# EAGLE board mainboard_v2.2 (EAGLE 6.3)
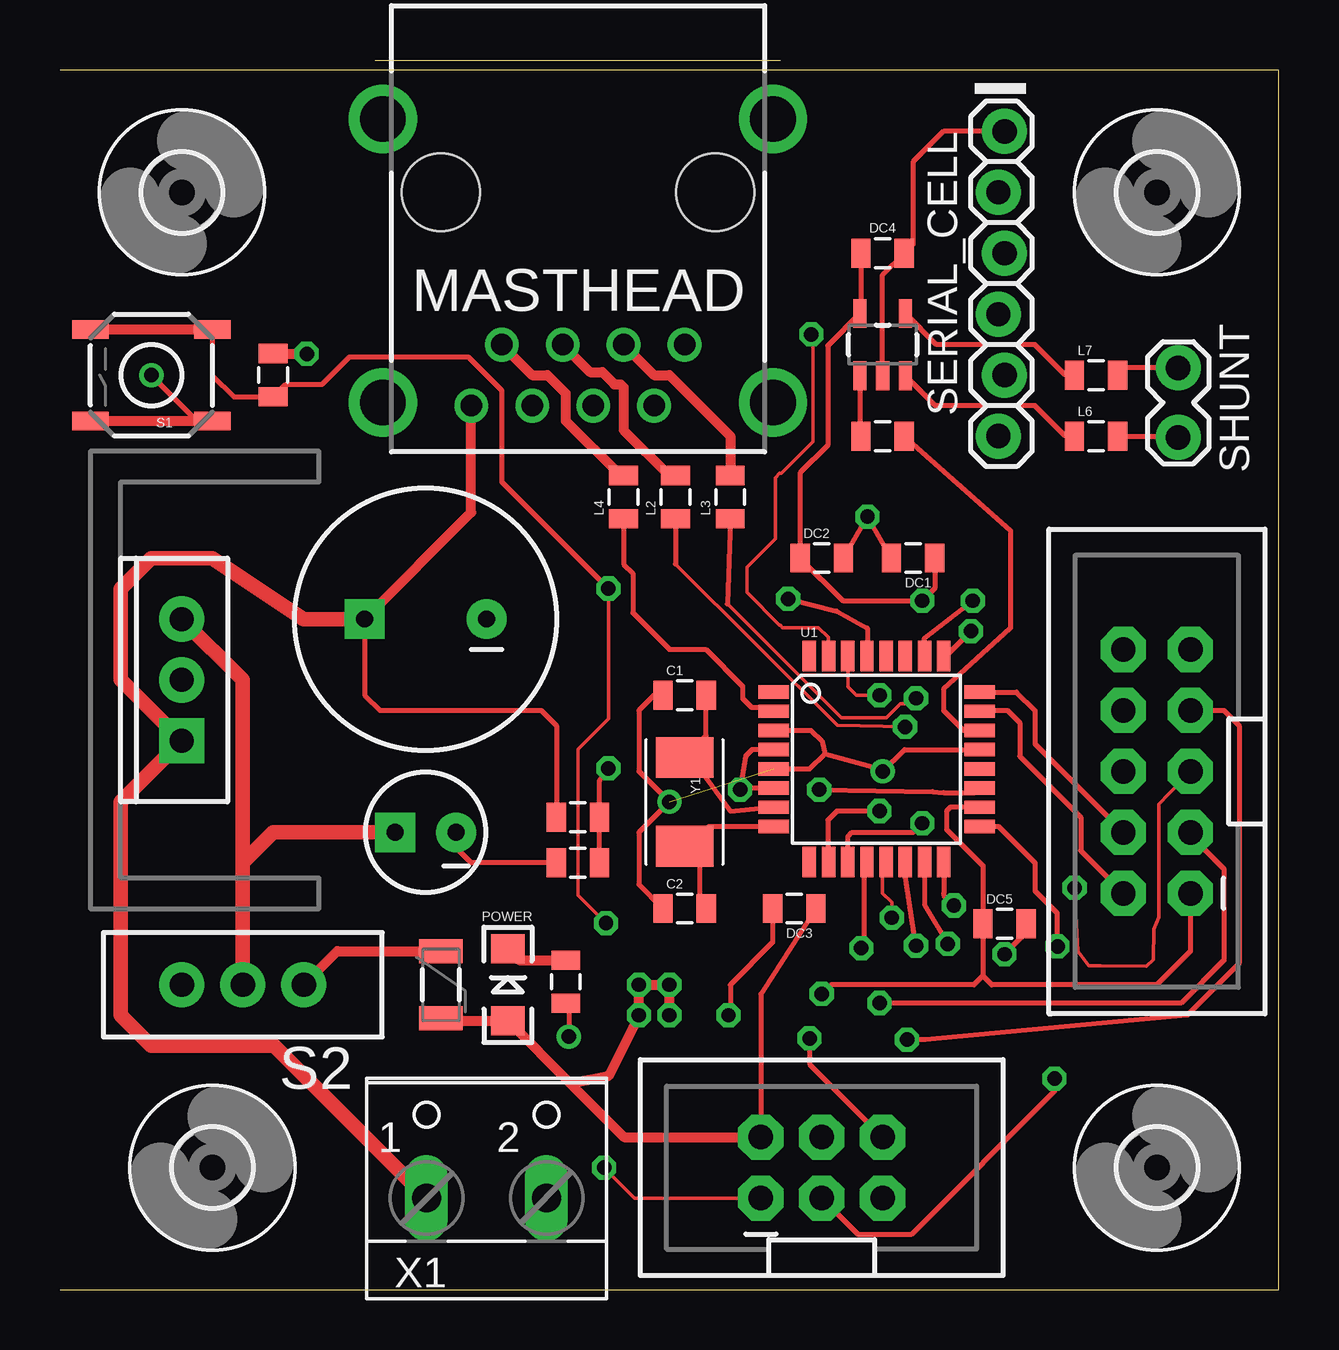
[diagram p0: board, top side]
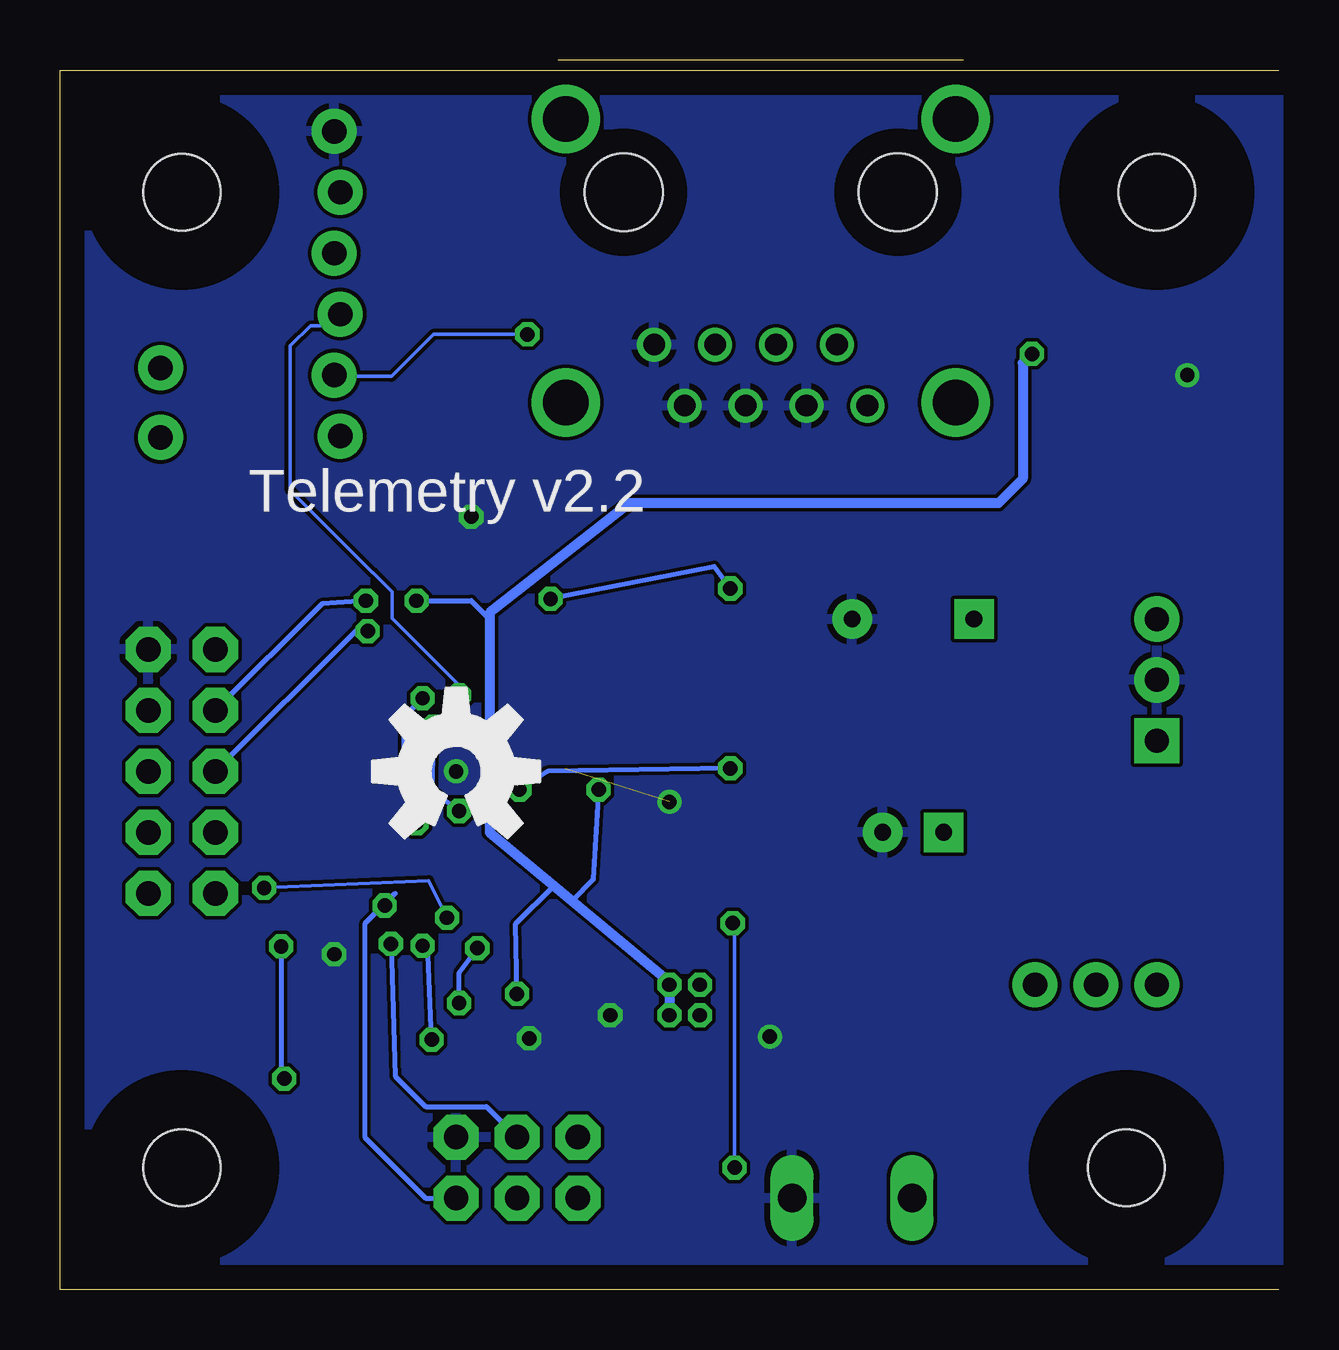
[diagram p1: board, bottom side, seen from below]

Size 50.8 x 51.23 mm. Coordinates in mm from the lower left corner, seen from the top.
Outline: 0,0 50.8,0 50.8,50.8 0,50.8
Copper layers (1*16): Top 0.035mm / dielectric 1.5mm / Bottom 0.035mm
Design rules "default *": minimum track width 6mil, minimum drill 13mil, track to track 6mil, track to pad 6mil, pad to pad 6mil, via to via 6mil, smd to smd 6mil, copper to edge 40mil, drill to drill 8mil, minimum pad ring 10mil, minimum via ring 8mil, stop-mask expansion 4mil, vias tented up to drill 26mil, thermal gap 10mil

## Footprints (pad centres in the part's own frame; a part is rotated, then mirrored left to right if it is on the bottom)
0805 = smd 0.8 x 1.2: 1 -0.9,0; 2 0.9,0
CPOL-RADIAL-1000UF-25V = drill 0.7 pad 1.651 square: 1 2.54,0 | drill 0.7 pad 1.651: 2 -2.54,0
CPOL-RADIAL-10UF-25V = drill 0.7 pad 1.651 square: 1 1.27,0 | drill 0.7 pad 1.651: 2 -1.27,0
3,2 = hole 3.2: 0,0
TO220-IGO = drill 1 pad 1.88: GND 0,0; OUT 2.54,0 | drill 1 pad 1.88 square: IN -2.54,0
2X3-SHROUDED = drill 1.016 pad 1.88 octagon: 1 -1.27,2.54; 2 1.27,2.54; 3 -1.27,0; 4 1.27,0; 5 -1.27,-2.54; 6 1.27,-2.54
2X5-SHROUDED_LOCK = drill 1.016 pad 1.88 octagon: 1 -1.397,5.08; 2 1.397,5.08; 3 -1.397,2.54; 4 1.397,2.54; 5 -1.397,0; 6 1.397,0; 7 -1.397,-2.54; 8 1.397,-2.54; 9 -1.397,-5.08; 10 1.397,-5.08
RJ45-SHIELD1 = drill 0.9 pad 1.4: 1 -4.445,6.35; 2 -3.175,8.89; 3 -1.905,6.35; 4 -0.635,8.89; 5 0.635,6.35; 6 1.905,8.89; 7 3.175,6.35; 8 4.445,8.89 | drill 1.9 pad 2.5: S1 -8.128,-3.048; S2 8.128,-3.048; S3 -8.128,8.76; S4 8.128,8.76 | hole 3.251: -5.715,0; 5.715,0
LED-1206 = smd 1.2 x 1.4: A -1.5,0; C 1.5,0
PTC-1206 = smd 1 x 1.8: 1 -1.4,0; 2 1.4,0
TACTILE_SWITCH_SMD = smd 1.524 x 0.762: 1 -2.54,1.905; 2 2.54,1.905; 3 -2.54,-1.905; 4 2.54,-1.905
SWITCH-SPDT = drill 1.016 pad 1.88: 1 0,2.54; 2 0,0; 3 0,-2.54
1X06_LOCK = drill 1.016 pad 1.88: 1 0,0; 2 2.54,-0.254; 3 5.08,0; 4 7.62,-0.254; 5 10.16,0; 6 12.7,-0.254
1X02_LOCK = drill 1.016 pad 1.88: 1 -0.178,0; 2 2.718,0
TQFP32-08 = smd 1.27 x 0.559: 1 -4.293,2.8; 2 -4.293,2; 3 -4.293,1.2; 4 -4.293,0.4; 5 -4.293,-0.4; 6 -4.293,-1.2; 7 -4.293,-2; 8 -4.293,-2.8; 17 4.293,-2.8; 18 4.293,-2; 19 4.293,-1.2; 20 4.293,-0.4; 21 4.293,0.4; 22 4.293,1.2; 23 4.293,2; 24 4.293,2.8 | smd 0.559 x 1.27: 9 -2.8,-4.293; 10 -2,-4.293; 11 -1.2,-4.293; 12 -0.4,-4.293; 13 0.4,-4.293; 14 1.2,-4.293; 15 2,-4.293; 16 2.8,-4.293; 25 2.8,4.293; 26 2,4.293; 27 1.2,4.293; 28 0.4,4.293; 29 -0.4,4.293; 30 -1.2,4.293; 31 -2,4.293; 32 -2.8,4.293
SOT23-5 = smd 0.55 x 1.2: 1 -0.95,-1.3; 2 0,-1.3; 3 0.95,-1.3; 4 0.95,1.3; 5 -0.95,1.3
W237-102 = drill 1.194 long: 1 -2.5,-1.27; 2 2.5,-1.27
CRYSTAL-TXC-7A = smd 1.7 x 2.4: P$1 1.85,0; P$2 -1.85,0

## Placement (x,y rotation side)
C1  22pF  [0805]  26.04,24.77 0 top
C2  22pF  [0805]  26.04,15.88 0 top
C9  100uF  [CPOL-RADIAL-1000UF-25V]  15.24,27.94 180 top
C10  10uF  [CPOL-RADIAL-10UF-25V]  15.24,19.05 180 top
DC1  0.1uF  [0805]  35.56,30.48 180 top
DC2  0.1uF  [0805]  31.75,30.48 0 top
DC3  0.1uF  [0805]  30.61,15.88 180 top
DC4  0.1uF  [0805]  34.29,43.18 0 top
DC5  0.1uF  [0805]  39.37,15.24 0 top
H1  MOUNT-HOLE3.2  [3,2]  6.35,5.08 0 top
H2  MOUNT-HOLE3.2  [3,2]  45.72,45.72 0 top
H3  MOUNT-HOLE3.2  [3,2]  5.08,45.72 0 top
H4  MOUNT-HOLE3.2  [3,2]  45.72,5.08 0 top
IC1  [TO220-IGO]  5.08,25.4 90 top
ICSP  [2X3-SHROUDED]  31.75,5.08 90 top
L2  [0805]  25.65,33.02 90 top
L3  [0805]  27.94,33.02 90 top
L4  [0805]  23.5,33.02 90 top
L6  [0805]  43.18,35.56 0 top
L7  [0805]  43.18,38.1 0 top
LCD  M05X2SHD_LOCK  [2X5-SHROUDED_LOCK]  45.72,21.59 180 top
LOGO2  OSHW-LOGOL  [OSHW-LOGO-L]  34.29,21.59 0 bottom
MASTHEAD  RJ45-8L21-B  [RJ45-SHIELD1]  21.59,45.72 180 top
POWER  [LED-1206]  18.67,12.7 90 top
PTC  750mA  [PTC-1206]  15.88,12.7 270 top
R1  10kΩ  [0805]  8.89,38.1 90 top
R2  10kΩ 0.1%  [0805]  21.59,19.68 180 top
R3  1.2kΩ 0.1%  [0805]  21.59,17.78 0 top
R4  44.2kΩ 0.1%  [0805]  34.29,35.56 180 top
R7  56Ω  [0805]  21.08,12.83 90 top
S1  [TACTILE_SWITCH_SMD]  3.81,38.1 180 top
S2  [SWITCH-SPDT]  7.62,12.7 270 top
SERIAL_CELL  [1X06_LOCK]  39.37,48.26 270 top
SHUNT  [1X02_LOCK]  46.61,35.69 90 top
U1  ATMEGA328P  [TQFP32-08]  34.04,22.1 0 top
U2  INA169  [SOT23-5]  34.29,39.37 0 top
X1  [W237-102]  17.78,5.08 0 top
Y1  [CRYSTAL-TXC-7A]  26.04,20.32 270 top

## Library data of the parts
C1 C2 C9 C10 DC1-DC5 = SparkFun-Capacitors
H1-H4 = holes
IC1 PTC = SparkFun-PowerIC
ICSP = SparkFun-Connectors; PROD_ID: CONN-10681
L2-L4 L6 L7 = SparkFun-Passives
LCD SERIAL_CELL SHUNT = SparkFun-Connectors
LOGO2 = SparkFun-Aesthetics
MASTHEAD = con-tycoelectronics; OC_FARNELL: unknown; OC_NEWARK: unknown
POWER = SparkFun-LED
R1-R4 R7 = SparkFun-Resistors
S1 = SparkFun-Electromechanical; PROD_ID: SWCH-08247
S2 = SparkFun-Electromechanical
U1 = SparkFun-DigitalIC; PROD_ID: IC-09069
U2 = SparkFun-AnalogIC
X1 = con-wago-500; MPN: 237-102; OC_FARNELL: unknown; OC_NEWARK: 70K9898
Y1 = SparkFun-FreqCtrl

## Nets
3.3V: DC1.1 DC2.1 DC3.1 DC4.1 DC5.1 ICSP.2 LCD.1 POWER.A PTC.2 R1.2 U1.4 U1.6 U1.18 U2.5
ANEM_CLK: L4.2 MASTHEAD.7
DIR_POT: L3.2 MASTHEAD.3
GND: C1.1 C2.1 C9.2 C10.2 DC1.2 DC2.2 DC3.2 DC4.2 DC5.2 IC1.GND ICSP.6 LCD.9 MASTHEAD.1 MASTHEAD.2 MASTHEAD.4 MASTHEAD.6 R3.1 R7.1 S1.1 S1.2 SERIAL_CELL.1 U1.3 U1.5 U1.21 U2.2 X1.2
I2CD: U1.27
I2CL: U1.28
IRQ: U1.32
LCD_D4: LCD.2 U1.23
LCD_D5: LCD.4 U1.24
LCD_D6: LCD.6 U1.25
LCD_D7: LCD.8 U1.26
LCD_E: LCD.7 U1.14
LCD_RS: LCD.3 U1.12
LCD_RW: LCD.5 U1.13
MISO: ICSP.5 U1.16
MOSI: ICSP.4 U1.15
N$1: PTC.1 S2.1
N$7: L3.1 U1.11
N$8: L2.1 U1.10
N$9: L4.1 U1.2
N$10: L6.1 U2.3
N$11: L7.1 U2.4
N$12: R4.2 U2.1
N$13: LCD.10
N$16: POWER.C R7.2
RESET: ICSP.1 R1.1 S1.3 S1.4 U1.29
SCK: ICSP.3 U1.17
SHIPS_BATTERY_VOLTAGE_ADC: R2.1 R3.2 U1.19
SHUNT: R4.1 U1.22
SHUNT+: L7.2 SHUNT.2
SHUNT-: L6.2 SHUNT.1
TEMP: L2.2 MASTHEAD.5
URX: SERIAL_CELL.4 U1.30
UTX: SERIAL_CELL.5 U1.31
VCC: C9.1 IC1.IN MASTHEAD.8 R2.2 X1.1
VREG_OUT: C10.1 IC1.OUT S2.2
XTAL1: C1.2 U1.7 Y1.P$2
XTAL2: C2.2 U1.8 Y1.P$1

## Tracks (layer width: path | path; a pad name or v marks a point on that pad's centre or on a via)
3.3V  (via drill 0.6)
  Top 0.152: 32.13,12.7 v31.75,12.32
  Top 0.203: DC3.1 29.21,12.31 ICSP.2 | LCD.1 47.12,14.1 45.72,12.7 38.84,12.7 38.47,13.07 | DC4.1 33.39,40.72 U2.5 32,39.33 32,35.18 30.85,34.02 DC2.1 32.63,28.7 v35.94,28.7 36.46,29.22 DC1.1 | U1.6 28.64,20.9 v28.35,20.83 28.57,22.23 28.85,22.5 U1.4 | U1.18 37.12,20.1 36.96,19.94 36.96,19.18 38.47,17.66 DC5.1 38.47,13.07 | 38.47,13.07 38.1,12.7 32.13,12.7
  Top 0.406: PTC.2 15.97,11.2 POWER.A 21.29,8.59 | 21.29,8.59 23.52,6.35 ICSP.2 | 21.29,8.59 22.86,8.89 v24.13,11.43 v24.13,12.7 v25.4,12.7 v25.4,11.43 | R1.2 v10.29,38.99
  Bottom 0.203: v35.94,28.7 33.66,28.7 32.89,27.94 | v28.35,20.83 28.57,17.09 29.46,16.2 | v31.75,12.32 31.8,15.24 30.22,16.83
  Bottom 0.406: v10.29,38.99 10.67,38.61 10.67,33.78 11.68,32.77 27.05,32.77 32.89,28.19 32.89,27.94 32.89,19.05 30.22,16.83 29.46,16.2 25.4,12.83 v25.4,11.43
ANEM_CLK
  Top 0.406: MASTHEAD.7 19.68,38.1 20.32,38.1 21.08,37.34 21.08,36.2 23.36,33.92 L4.2
DIR_POT
  Top 0.406: MASTHEAD.3 24.77,38.1 25.4,38.1 27.94,35.56 L3.2
GND  (via drill 0.6)  (1 unrouted)
  Top 0.203: S1.1 5.85,36.2 arc-45 5.62,36.29 v3.81,38.1 | R7.1 21.21,11.8 v21.21,10.54 | C1.1 24.77,24.77 24.13,24.13 24.13,21.59 v25.4,20.32 24.13,19.05 24.13,16.88 C2.1 | R3.1 17.14,17.78 16.51,18.41 C10.2 | DC2.2 v33.66,32.21 DC1.2 | v39.37,13.97 40.27,14.87 DC5.2 | SERIAL_CELL.1 36.83,48.26 35.56,46.99 35.56,43.55 DC4.2 34.29,42.28 U2.2 | 31.88,22.33 34.18,21.7 v34.29,21.59 35.2,22.5 U1.21 | U1.3 31.31,23.3 31.75,22.86 31.88,22.33 | U1.5 31.24,21.7 31.88,22.33 | DC3.2 29.71,14.47 27.94,12.7 27.94,11.51 v27.86,11.43 | v31.24,10.46 31.24,9.4 ICSP.6
  Top 0.406: S1.2 S1.1
  pour Bottom: 0,50.8 50.8,50.8 50.8,0 0,0
LCD_D4
  Top 0.203: U1.23 38.36,24.13 39.5,24.13 40.01,23.62 40.01,22.23 42.55,19.68 42.55,18.29 LCD.2
LCD_D5
  Top 0.203: U1.24 39.87,24.9 40.64,24.13 40.64,22.73 LCD.4
LCD_D6  (via drill 0.6)
  Top 0.203: U1.25 36.93,26.39 v37.97,27.43
  Bottom 0.203: v37.97,27.43 38.48,27.43 LCD.6
LCD_D7  (via drill 0.6)
  Top 0.203: U1.26 36.04,27.15 v38.05,28.7
  Bottom 0.203: v38.05,28.7 39.88,28.57 LCD.8
LCD_E  (via drill 0.6)
  Top 0.203: LCD.7 48.51,24.13 49.15,23.5 49.15,13.59 46.99,11.43 36.07,10.41 v35.31,10.41 | v35.69,14.33 35.18,17.62 U1.14
  Bottom 0.203: v35.31,10.41 35.46,13.95 v35.69,14.33
LCD_RS  (via drill 0.6)
  Top 0.203: LCD.3 47.12,18.92 48.51,17.53 48.51,13.72 46.74,11.94 v34.16,11.94 | v33.4,14.22 33.53,14.35 33.53,17.7 U1.12
  Bottom 0.203: v34.16,11.94 34.16,13.21 v33.4,14.22
LCD_RW  (via drill 0.6)
  Top 0.152: U1.13 34.29,17.66 34.29,16.51 34.67,16.13 v34.67,15.49 | v42.29,16.74 42.42,14.1 42.88,13.49 43.36,13.49 45.29,13.46 45.57,13.74 45.59,15.01 45.8,15.52 45.8,20.22 LCD.5
  Bottom 0.152: v34.67,15.49 35.43,17.04 v42.29,16.74
MISO  (via drill 0.6)
  Top 0.203: U1.16 36.84,16.52 36.83,16.51 36.83,16.43 v37.26,16
  Bottom 0.203: v37.26,16 37.26,16.08 | 37.26,16.08 36.83,16.51 | 37.26,16.08 38.1,15.24 38.1,6.35 35.56,3.81 ICSP.5
MOSI  (via drill 0.6)
  Top 0.203: U1.15 36.04,16.03 v37.01,14.4
  Bottom 0.203: v37.01,14.4 36.83,8.89 35.56,7.62 33.02,7.62 ICSP.4
N$1
  Top 0.406: S2.1 11.56,14.1 PTC.1
N$7  (via drill 0.6)
  Top 0.152: 27.81,28.57 32.56,23.82 34.44,23.82 35.03,24.41 35.46,24.41 v35.69,24.64
  Top 0.203: U1.11 32.84,18.87 33.02,19.05 35.56,19.05 v35.94,19.43 | L3.1 27.81,28.57
  Bottom 0.203: v35.94,19.43 35.94,21.21 36.45,21.72 36.45,23.88 v35.69,24.64
N$8  (via drill 0.6)
  Top 0.152: 25.65,30.23 32.41,23.52 v35.23,23.44
  Top 0.203: L2.1 25.65,30.23 | v34.16,19.94 32.38,19.94 32,19.56 32,17.84 U1.10
  Bottom 0.203: v35.23,23.44 35.31,20.83 v34.16,19.94
N$9
  Top 0.203: L4.1 23.5,30.23 23.88,29.84 23.88,28.19 25.4,26.67 26.92,26.67 28.45,25.15 28.45,24.64 28.83,24.26 29.58,24.26 U1.2
N$10
  Top 0.203: L6.1 41.91,35.56 40.64,36.83 36.48,36.83 U2.3
N$11
  Top 0.203: L7.1 41.91,38.1 40.64,39.37 36.54,39.37 U2.4
N$12
  Top 0.203: U2.1 33.34,35.61 R4.2
N$16
  Top 0.406: POWER.C 19.14,13.73 R7.2
RESET  (via drill 0.6)
  Top 0.152: ICSP.1 23.95,3.81 v22.68,5.08 | v22.76,15.27 21.59,16.43 21.59,22.5 22.86,23.77 v22.86,29.21
  Top 0.203: S1.3 6.35,38.1 7.25,37.2 R1.1 9.41,37.72 10.92,37.72 12.06,38.86 17.02,38.86 18.41,37.47 18.41,33.66 v22.86,29.21 | v30.35,28.78 32.38,28.27 33.66,27.56 33.66,26.41 U1.29
  Top 0.406: S1.4 S1.3
  Bottom 0.152: v22.68,5.08 22.68,15.19 v22.76,15.27
  Bottom 0.203: v22.86,29.21 23.52,30.12 v30.35,28.78
SCK  (via drill 0.6)
  Top 0.203: U1.17 39.12,19.3 40.64,17.78 40.64,16.61 41.55,15.7 41.55,14.33 v41.58,14.3 | v41.45,8.79 41.45,8.26 35.48,2.29 33.27,2.29 ICSP.3
  Bottom 0.203: v41.58,14.3 41.58,8.91 v41.45,8.79
SHIPS_BATTERY_VOLTAGE_ADC  (via drill 0.6)
  Top 0.203: R3.2 R2.1 22.49,21.22 v22.86,21.72 | v31.65,20.83 36.37,20.75 36.83,20.7 38.13,20.7 U1.19
  Bottom 0.203: v22.86,21.72 30.48,21.59 v31.65,20.83
SHUNT
  Top 0.203: R4.1 39.62,31.63 39.62,27.56 36.83,25.02 36.83,24.13 37.66,23.3 U1.22
SHUNT+
  Top 0.203: SHUNT.2 44.38,38.41 L7.2
SHUNT-
  Top 0.203: L6.2 46.56,35.56 SHUNT.1
TEMP
  Top 0.406: MASTHEAD.5 22.1,38.23 22.61,38.23 23.11,37.72 23.37,37.72 23.5,37.59 23.5,35.81 25.39,33.92 L2.2
URX  (via drill 0.6)
  Top 0.152: U1.30 32.84,25.13 33.2,24.77 v34.16,24.77
  Bottom 0.152: v34.16,24.77 34.16,25.17 36.96,27.96 36.96,29.08 37.74,29.87 37.77,29.87 41.2,33.3 41.2,39.32 40.36,40.16 39.6,40.16 SERIAL_CELL.4
UTX  (via drill 0.6)
  Top 0.152: U1.31 32.04,27.17 31.62,27.58 30.12,27.58 30.02,27.69 30,27.69 28.63,29.06 28.63,30.1 29.82,31.29 29.82,33.83 30,34.01 30.07,34.01 31.39,35.33 31.39,39.73 v31.32,39.8
  Bottom 0.152: v31.32,39.8 35.23,39.8 36.98,38.05 39.32,38.05 SERIAL_CELL.5
VCC
  Top 0.203: C9.1 12.7,24.77 13.34,24.13 20.05,24.13 20.69,23.5 R2.2
  Top 0.406: C9.1 17.14,32.38 MASTHEAD.8
  Top 0.61: X1.1 8.93,10.16 3.81,10.16 2.54,11.43 2.54,20.32 IC1.IN 2.54,25.4 2.54,29.21 3.81,30.48 6.35,30.48 10.16,27.94 C9.1
VREG_OUT
  Top 0.61: IC1.OUT 7.62,25.4 7.62,17.78 | 7.62,17.78 S2.2 | C10.1 8.89,19.05 7.62,17.78
XTAL1
  Top 0.203: Y1.P$2 26.93,23.07 | 26.93,23.07 C1.2 | 26.93,23.07 26.93,21.32 27.94,19.94 29.39,20.07 U1.7
XTAL2
  Top 0.203: C2.2 26.67,16.14 26.67,17.78 26.04,18.41 Y1.P$1 26.47,18.47 27.05,19.3 U1.8

## Text on the board
Top: - GND under micro not connected to anything / - RST and MISO reversed / - Differnet footprint for slide switch / - Need cap on AREF - figure value / - Wind dir needs routed to an ADC pin / - 5-12v select jumper on masthead connector / - 12, 5, gnd test points
bNames: Telemetry v2.2